# Altium PCB mainPCB.PcbDoc
Units mil, origin at the board's own origin, x right, y up, seen from the top; angles counter-clockwise.
Board outline 5975 x 3158 mil, 2 copper layers (Top Layer, Bottom Layer); 133 components, 132 nets, 584 pads, 62 vias.
Unrouted connection lines stored in the file: 153.
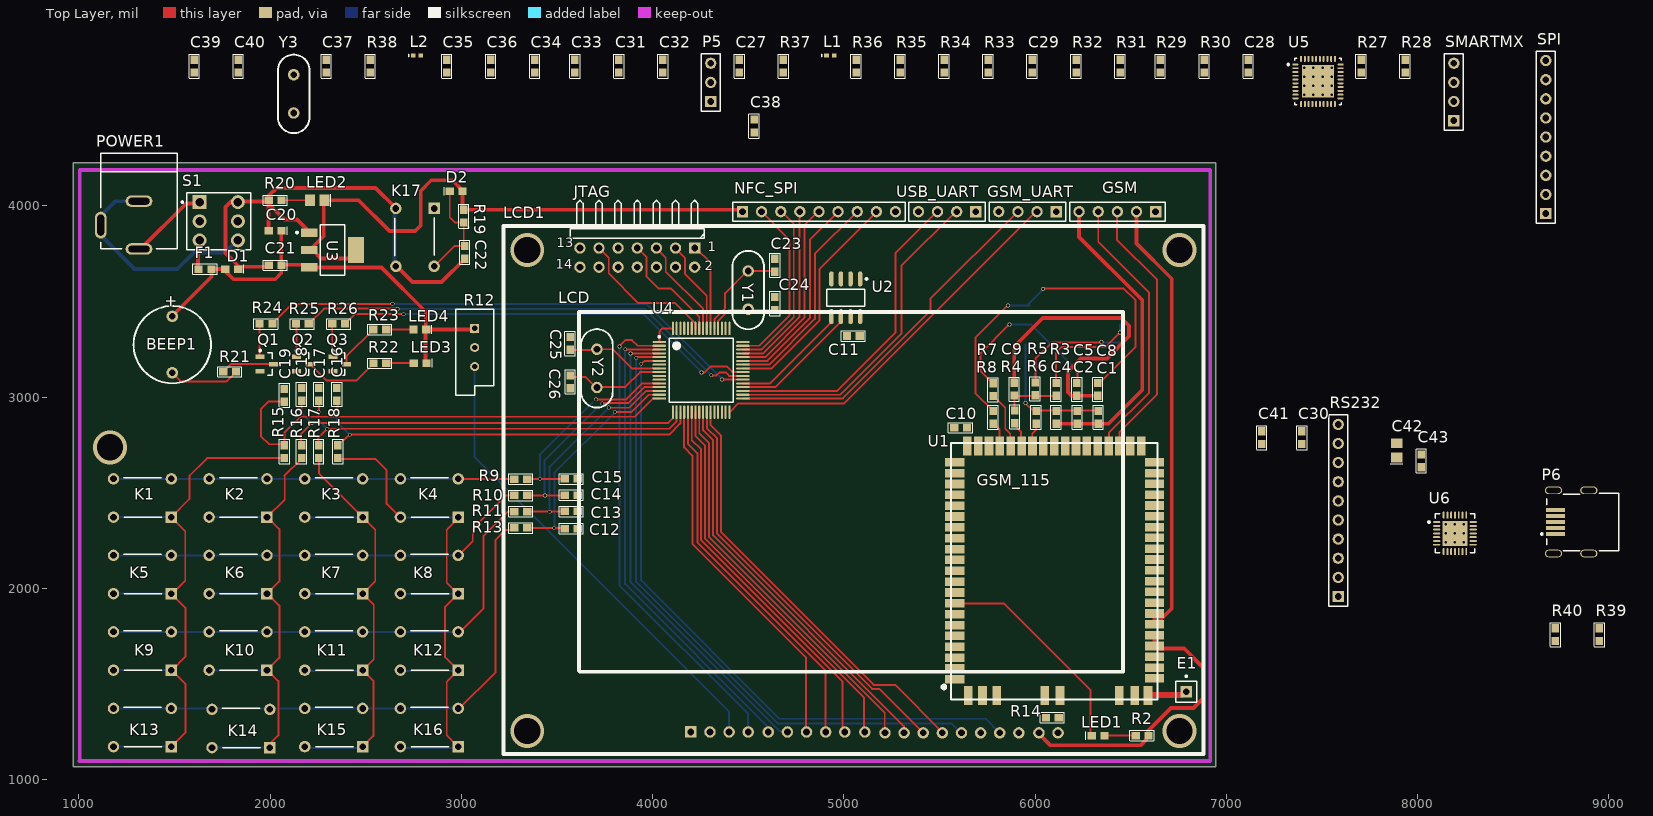
[diagram p0: Top Layer view]
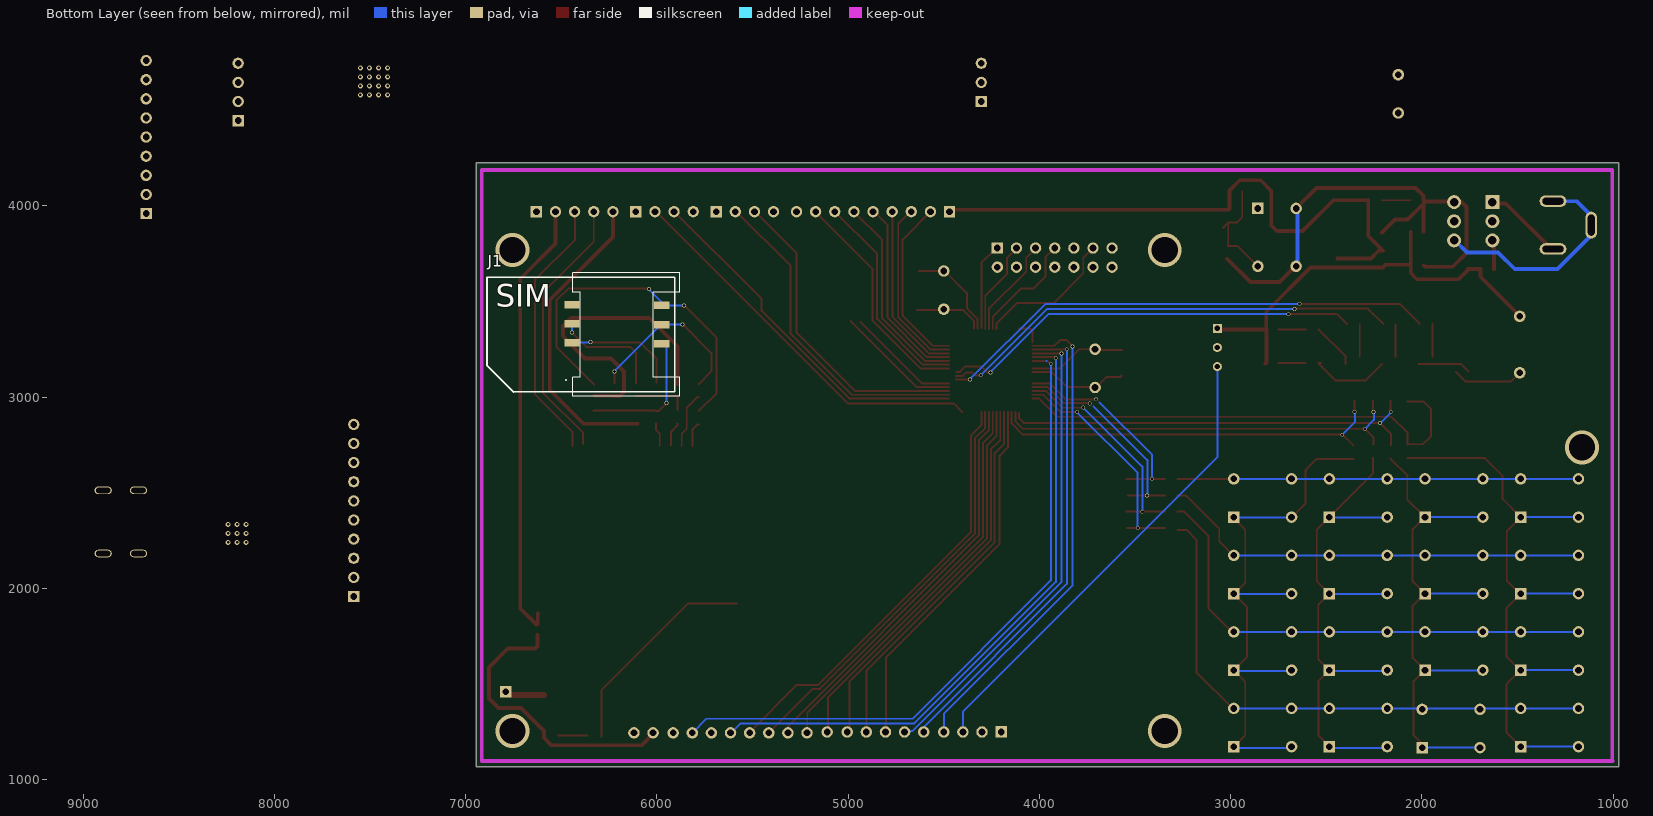
[diagram p1: Bottom Layer view, seen from below]

## Layer stack, top to bottom
Top Layer: signal copper 1.4
Dielectric: dielectric 12.6, FR-4, Dk 4.8
Bottom Layer: signal copper 1.4

## Board outline
970,4227 6945,4227 6945,1069 970,1069

## Design rules (kind name [scope] priority, off if disabled: settings)
Clearance [All] p1: gap=10
ComponentClearance [All] p1: gap=10 collisioncheckmode=3 verticalgap=10
HoleSize [All] p1: absolutevalues=TRUE maxlimit=200 minlimit=1 maxpercent=80.000 minpercent=20.000
PolygonConnect [All] p1: connectstyle=Relief reliefconductorwidth=10 reliefentries=4 polygonreliefangle="90 Angle"
RoutingVias [All] p1: holewidth=20 width=30 viastyle="Through Hole" minholewidth=15 minwidth=20 maxholewidth=196.85 maxwidth=314.96
SolderMaskExpansion [All] p1: expansion=4
TestPointUsage [All] p1: valid=0 allowmultiple=FALSE
Testpoint [All] p1: side=15 testpointundercomponent=TRUE minsize=40 maxsize=100 preferedsize=60 minholesize=0 maxholesize=40 preferedholesize=32 testpointgrid=1 style=1023 order=0-112345678
Width [All] p1: maxlimit=40 minlimit=10 preferedwidth=10
17 further rules are at their usual default settings.

## Classes and differential pairs
component class MSP-RFID: BEEP1 C10 C11 C13 C14 C15 C16 C17 C18 C19 C20 C21 C22 C23 C24 C25 C26 C27 D1 D2 F1 GSM_UART JTAG K1 K2 K3 K4 K5 K6 K7 K8 K9 K10 K11 K12 K13 K14 K15 K16 K17 LCD1 LED2 LED3 LED4 NFC_SPI POWER1 Q1 Q2 Q3 R9 R10 R11 R12 R13 R14 R15 R16 R17 R18 R19 R20 R21 R22 R23 R24 R25 R26 S1 U2 U3 U4 USB_UART Y1 Y2
component class NFC: C27 C28 C29 C31 C32 C33 C34 C35 C36 C37 C38 C39 C40 C41 C42 C43 L1 L2 P5 P6 R27 R28 R29 R30 R31 R32 R33 R34 R35 R36 R37 R38 R39 R40 RS232 SMARTMX SPI U5 U6 Y3
component class GSMPart: C1 C2 C4 C5 C8 C9 C10 E1 GSM J1 LED1 R2 R3 R4 R5 R6 R7 R8 U1

## Components (designator, comment, footprint, x,y, rotation, side; value= is the part's Value field where it differs from the comment)
BEEP1 "BEEP" BEEP 1489,3423 r270 top
C1 "Cap" 1608[0603] 6330,2895 r90 top
C2 "Cap" 1608[0603] 6220,2895 r90 top
C4 "Cap" 1608[0603] 6110,2895 r90 top
C5 "Cap" 1608[0603] 6218.6,3041 r90 top
C8 "Cap" 1608[0603] 6327.8,3041 r90 top
C9 "Cap" 1608[0603] 5891,3042 r270 top
C10 "Cap" 1608[0603] 5610,2840 r0 top
C11 "Cap" 1608[0603] 5050,3320 r0 top
C12 "Cap" 1608[0603] 3575,2313 r0 top
C13 "Cap" 1608[0603] 3575,2403 r0 top
C14 "Cap" 1608[0603] 3575,2488 r0 top
C15 "Cap" 1608[0603] 3575,2573 r0 top
C16 "Cap" 1608[0603] 2350,3015 r90 top
C17 "Cap" 1608[0603] 2255,3015 r90 top
C18 "Cap" 1608[0603] 2165,3015 r90 top
C19 "Cap" 1608[0603] 2075,3010 r90 top
C20 "CAP POL" "1608[0603] - POL" 2027,3870 r180 top
C21 "Cap" 1608[0603] 2027,3690 r0 top
C22 "Cap" 1608[0603] 3018,3757 r270 top
C23 "Cap" 1608[0603] 4640,3690 r270 top
C24 "Cap" 1608[0603] 4640,3490 r270 top
C25 "Cap" 1608[0603] 3569,3281 r90 top
C26 "Cap" 1608[0603] 3570,3080 r270 top
C27 "Cap" 1608[0603] 4454,4731 r90 top
C28 "Cap" 1608[0603] 7114,4731 r90 top
C29 "Cap" 1608[0603] 5984,4731 r90 top
C30 "Cap" 1608[0603] 7395,2789 r90 top
C31 "Cap" 1608[0603] 3824,4731 r90 top
C32 "Cap" 1608[0603] 4054,4731 r90 top
C33 "Cap" 1608[0603] 3594,4731 r90 top
C34 "Cap" 1608[0603] 3384,4731 r90 top
C35 "Cap" 1608[0603] 2924,4731 r90 top
C36 "Cap" 1608[0603] 3154,4731 r90 top
C37 "Cap" 1608[0603] 2294,4731 r90 top
C38 "Cap" 1608[0603] 4531,4418 r90 top
C39 "Cap" 1608[0603] 1604,4731 r90 top
C40 "Cap" 1608[0603] 1834,4731 r90 top
C41 "Cap" 1608[0603] 7185,2789 r90 top
C42 "CAP POL" "2012[0805] - POL" 7890,2722 r90 top
C43 "Cap" 1608[0603] 8019,2667 r90 top
D1 "1N4001" "1608[0603] - POL" 1800,3670 r180 top
D2 "1N4001" "1608[0603] - POL" 2973,4077 r0 top
E1 "Antenna" PIN1 6790,1460 r0 top
F1 "Fuse" 1608[0603] 1660,3670 r0 top
GSM "Header 5" HDR1X5 6630,3970 r180 top
GSM_UART "Header 4" HDR1X4 6110,3970 r180 top
J1 "SIMCard" PCB_SIM 5880,3650 r0 bottom locked
JTAG "Header 7X2H" HDR2X7H 4220,3780 r180 top
K1 "Key" KEY-4 1484,2373.07 r180 top
K2 "Key" KEY-4 1984,2373.07 r180 top
K3 "Key" KEY-4 2484,2373.07 r180 top
K4 "Key" KEY-4 2984,2373.07 r180 top
K5 "Key" KEY-4 1484,1973.07 r180 top
K6 "Key" KEY-4 1984,1973.07 r180 top
K7 "Key" KEY-4 2484,1973.07 r180 top
K8 "Key" KEY-4 2984,1973.07 r180 top
K9 "Key" KEY-4 1484,1573.07 r180 top
K10 "Key" KEY-4 1984,1573.07 r180 top
K11 "Key" KEY-4 2484,1573.07 r180 top
K12 "Key" KEY-4 2984,1573.07 r180 top
K13 "Key" KEY-4 1484,1173.07 r180 top
K14 "Key" KEY-4 1999,1168.07 r180 top
K15 "Key" KEY-4 2484,1173.07 r180 top
K16 "Key" KEY-4 2984,1173.07 r180 top
K17 "MCU_RST" KEY-4 2858,3987 r270 top
L1 "Inductor" 0402-A 4929,4786 r0 top
L2 "Inductor" 0402-A 2769,4786 r0 top
LCD1 "LCD12864" LCD-20PIN 4200,1250 r0 top locked
LED1 "Red LED" "1608[0603] - POL" 6329,1231 r0 top
LED2 "LED" "2012[0805] - POL" 2247,4030 r180 top
LED3 "LED" "1608[0603] - POL" 2784.46,3178 r180 top
LED4 "LED" "1608[0603] - POL" 2783.46,3354 r180 top
NFC_SPI "Header 9" HDR1X9 4470,3970 r0 top
P5 "Antenna" HDR1X3 4304,4546 r90 top
P6 "Mini USB-B" "MINI USB-501" 9025,2348 r0 top
POWER1 "POWER" POWER 1315,3775 r270 top
Q1 "NPN" SOT23-3L 1984,3173 r0 top
Q2 "NPN" SOT23-3L 2174,3173 r0 top
Q3 "NPN" SOT23-3L 2364,3173 r0 top
R2 "RES" 1608[0603] 6559,1231 r180 top
R3 "RES" 1608[0603] 6109.4,3041 r270 top
R4 "RES" 1608[0603] 5893.2,2897 r270 top
R5 "RES" 1608[0603] 6000.2,3044 r270 top
R6 "RES" 1608[0603] 6005,2895 r90 top
R7 "RES" 1608[0603] 5780,3040 r90 top
R8 "RES" 1608[0603] 5780,2895 r90 top
R9 "RES" 1608[0603] 3311,2572 r180 top
R10 "RES" 1608[0603] 3311,2487 r180 top
R11 "RES" 1608[0603] 3311,2402 r180 top
R12 "RPot" VR5 3070,3260 r270 top
R13 "RES" 1608[0603] 3311,2317 r180 top
R14 "Res" 1608[0603] 6090,1325 r180 top
R15 "RES" 1608[0603] 2075,2716 r270 top
R16 "RES" 1608[0603] 2165,2716 r270 top
R17 "RES" 1608[0603] 2255,2716 r270 top
R18 "RES" 1608[0603] 2355,2716 r270 top
R19 "Res" 1608[0603] 3013,3947 r90 top
R20 "Res" 1608[0603] 2027,4030 r180 top
R21 "Res" 1608[0603] 1789,3133 r180 top
R22 "Res" 1608[0603] 2574.46,3178 r180 top
R23 "Res" 1608[0603] 2573.46,3354 r180 top
R24 "Res" 1608[0603] 1979,3383 r180 top
R25 "Res" 1608[0603] 2169,3383 r180 top
R26 "Res" 1608[0603] 2359,3383 r180 top
R27 "RES" 1608[0603] 7704,4731 r90 top
R28 "RES" 1608[0603] 7934,4731 r90 top
R29 "RES" 1608[0603] 6654,4731 r90 top
R30 "RES" 1608[0603] 6884,4731 r90 top
R31 "RES" 1608[0603] 6444,4731 r90 top
R32 "RES" 1608[0603] 6214,4731 r90 top
R33 "RES" 1608[0603] 5754,4731 r90 top
R34 "RES" 1608[0603] 5524,4731 r90 top
R35 "RES" 1608[0603] 5294,4731 r90 top
R36 "RES" 1608[0603] 5064,4731 r90 top
R37 "RES" 1608[0603] 4684,4731 r90 top
R38 "RES" 1608[0603] 2524,4731 r90 top
R39 "Res" 1608[0603] 8950,1759 r90 top
R40 "Res" 1608[0603] 8720,1759 r90 top
RS232 "Header 10" HDR1X10 7585,1958 r90 top
S1 "SW-DPDT" DPDT-6 1732,3920 r0 top
SMARTMX "Header 4" HDR1X4 8189,4446 r90 top
SPI "Header 9" HDR1X9 8670,3960 r90 top
U1 "GSM_115" PCB_GSM_115 5560,1420 r180 top
U2 "AT24C04" SOIC127P600-8AN 5010,3520 r270 top
U3 "REG1117-3.3" SOT223 2327,3770 r270 top
U4 "MSP430F149" SQFP50P1200X1200-64N 4254,3141 r0 top
U5 "PN512-P40" QFN50P600X600-40VN 7479,4651 r0 top
U6 "CP2101" QFN50P500X500-28VAN 8195,2288 r0 top
USB_UART "Header 4" HDR1X4 5690,3970 r180 top
Y1 "XTAL" XTAL 4500,3560 r90 top
Y2 "XTAL" XTAL 3709,3151 r90 top
Y3 "27.12MHz" XTAL 2124,4586 r90 top

## Footprints (in the part's own frame and the unit in brackets; to place one, negate y for a bottom-side part, rotate by r counter-clockwise, add the part's x,y. Pads: shape width x height; smd on the part's side, far side on the other; paste and mask are expansions set on the pad)
0402-A [mm] "Chip Inductor; Body 1 x 0.5 mm (LxW typ)"
  rect 0.6x0.5 smd: 1(-0.5,0) 2(0.5,0)
  silkscreen extent -1.1,-0.15 -1.1,0.15
1608[0603] [mm] "Chip Capacitor; Body 1.6 x 0.8 mm (LxW typ)"
  rect 1.1x1 smd: 1(-0.85,0) 2(0.85,0)
  silkscreen extent -1.6,-0.69 1.6,0.69
"1608[0603] - POL" [mm] "Chip Capacitor; Body 1.6 x 0.8 mm (LxW typ)"
  rect 1.1x1 smd: 1(-0.85,0) 2(0.85,0)
  silkscreen extent -1.6,-0.56 -1.6,0.53
"2012[0805] - POL" [mm] "Chip Resistor; Body 2.0 x 1.3 mm (LxW typ)"
  rect 1.3x1.5 smd: 1(-0.95,0) 2(0.95,0)
  silkscreen extent -1.8,-0.81 -1.8,0.84
BEEP [mil]
  round 60 hole 35: 1(0,0) 2(295.28,0)
  silkscreen extent -54,-202 350,202
DPDT-6 [mm] "Double-Pole, Double-Throw Switch; 6 Leads"
  rect 1.85x1.85 hole 1.1: 1(-2.54,2.54)
  round 1.85 hole 1.1: 2(-2.54,0) 3(-2.54,-2.54) 4(2.54,-2.54) 5(2.54,0) 6(2.54,2.54)
  silkscreen extent -4.96,-3.81 4.28,3.81
HDR1X3 [mm] "Connector; Header; 3 Position"
  rect 1.5x1.5 hole 0.9: 1(0,0)
  round 1.5 hole 0.9: 2(2.54,0) 3(5.08,0)
  silkscreen extent -1.27,-1.27 6.35,1.27
HDR1X4 [mm] "Connector; Header; 4 Position"
  rect 1.5x1.5 hole 0.9: 1(0,0)
  round 1.5 hole 0.9: 2(2.54,0) 3(5.08,0) 4(7.62,0)
  silkscreen extent -1.27,-1.27 8.89,1.27
HDR1X5 [mm] "Connector; Header; 5 Position"
  rect 1.5x1.5 hole 0.9: 1(0,0)
  round 1.5 hole 0.9: 2(2.54,0) 3(5.08,0) 4(7.62,0) 5(10.16,0)
  silkscreen extent -1.27,-1.27 11.43,1.27
HDR1X9 [mm] "Connector; Header; 9 Position"
  rect 1.5x1.5 hole 0.9: 1(0,0)
  round 1.5 hole 0.9: 2(2.54,0) 3(5.08,0) 4(7.62,0) 5(10.16,0) 6(12.7,0) 7(15.24,0) 8(17.78,0) 9(20.32,0)
  silkscreen extent -1.27,-1.27 21.59,1.27
HDR1X10 [mm] "Connector; Header; 10 Position"
  rect 1.5x1.5 hole 0.9: 1(0,0)
  round 1.5 hole 0.9: 2(2.54,0) 3(5.08,0) 4(7.62,0) 5(10.16,0) 6(12.7,0) 7(15.24,0) 8(17.78,0) 9(20.32,0) 10(22.86,0)
  silkscreen extent -1.27,-1.27 24.13,1.27
HDR2X7H [mm] "Connector; Header; 7x2 Position; Right Angle"
  rect 1.5x1.5 hole 0.9: 1(0,0)
  round 1.5 hole 0.9: 2(0,2.54) 3(2.54,0) 4(2.54,2.54) 5(5.08,0) 6(5.08,2.54) 7(7.62,0) 8(7.62,2.54) 9(10.16,0) 10(10.16,2.54) 11(12.7,0) 12(12.7,2.54) 13(15.24,0) 14(15.24,2.54)
  silkscreen extent -1.27,-6.35 16.51,-1.27
KEY-4 [mil]
  rect 60x60 hole 35: 1(0,0)
  round 60 hole 35: 1(302.36,0) 2(0,-200) 2(302.36,-200)
  silkscreen extent 50,-205 248,0
LCD-20PIN [mil]
  rect 60x60 hole 35: 1(0,0)
  round 60 hole 35: 2(100,0) 3(200,0) 4(300,0) 5(405,0) 6(505,0) 7(605,0) 8(705,0) 9(805,0) 10(910,0) 11(1015,-5) 12(1115,-5) 13(1215,-5) 14(1315,-5) 15(1415,-5) 16(1515,-5) 17(1615,-5) 18(1715,-5) 19(1820,-5) 20(1920,-5)
  silkscreen extent -980,-115 2680,2645
"MINI USB-501" [mm]
  rect 2.5x0.5 smd: 1(-7.723,-1.6) 2(-7.723,-0.8) 3(-7.723,0) 4(-7.723,0.8) 5(-7.723,1.6)
  round 0.6 hole 0.9 unplated: MH1(-5.25,2.2) MH2(-5.25,-2.2)
  oval 2.3x1 hole 0.7 slot 1.9 at 0 deg: ""(-8.001,-4.191) ""(-8.001,4.191) ""(-3.302,-4.191) ""(-3.302,4.191)
  silkscreen extent -9.67,-3.81 0.7,3.81
PCB_GSM_115 [mil]
  rect 100x45 smd: 1(-20,-105) 2(-20,-161.75) 3(-20,-218.5) 4(-20,-275.25) 5(-20,-332) 6(-20,-388.75) 7(-20,-445.5) 8(-20,-502.25) 9(-20,-559) 10(-20,-615.75) 11(-20,-672.5) 12(-20,-729.25) 13(-20,-786) 14(-20,-842.75) 15(-20,-899.5) 16(-20,-956.25) 17(-20,-1013) 18(-20,-1069.75) 19(-20,-1126.5) 20(-20,-1183.25) 21(-20,-1240) 39(-1065,-1240) 40(-1065,-1183.5) 41(-1065,-1127) 42(-1065,-1070.5) 43(-1065,-1014) 44(-1065,-957.5) 45(-1065,-901) 46(-1065,-844.5) 47(-1065,-788) 48(-1065,-731.5) 49(-1065,-675) 50(-1065,-618.5) 51(-1065,-562) 52(-1065,-505.5) 53(-1065,-449) 54(-1065,-392.5) 55(-1065,-336) 56(-1065,-279.5) 57(-1065,-223) 58(-1065,-166.5) 59(-1065,-110)
  rect 45x100 smd: 22(-85,-1325) 23(-141.87,-1325) 24(-198.75,-1325) 25(-255.62,-1325) 26(-312.5,-1325) 27(-369.37,-1325) 28(-426.25,-1325) 29(-483.12,-1325) 30(-540,-1325) 31(-596.87,-1325) 32(-653.75,-1325) 33(-710.62,-1325) 34(-767.5,-1325) 35(-824.37,-1325) 36(-881.25,-1325) 37(-938.12,-1325) 38(-995,-1325) 60(-1030,-20) 61(-960,-20) 62(-880,-20) 63(-570,-20) 64(-490,-20) 65(-240,-20) 66(-165,-20) 67(-90,-20)
  silkscreen extent -1080,-1340 44,0
PCB_SIM [mm]
  rect 2x1 smd: 1(2.4,9.4) 2(2.4,6.86) 3(2.4,4.32) 4(14.3,4.22) 5(14.3,6.76) 6(14.3,9.3)
  silkscreen extent 0,0 25.6,16.4
PIN1 [mm] "Generic Antenna; 1 Lead"
  rect 1.5x1.5 hole 0.9: 1(0,0)
  silkscreen extent -1.4,-1.4 1.4,2.17
POWER [mil]
  oval 60x140 hole 35 slot 110 at 90 deg: 1(0,0) 2(-250,0)
  oval 140x60 hole 35 slot 110 at 0 deg: 2(-125,-200)
  silkscreen extent -500,-200 0,200
QFN50P500X500-28VAN [mm] "28-Pin Plastic Quad Flat No-Lead 0.5 mm Pitch"
  oval 0.95x0.25 smd: 1(-2.425,1.5) 2(-2.425,1) 3(-2.425,0.5) 4(-2.425,0) 5(-2.425,-0.5) 6(-2.425,-1) 7(-2.425,-1.5) 15(2.425,-1.5) 16(2.425,-1) 17(2.425,-0.5) 18(2.425,0) 19(2.425,0.5) 20(2.425,1) 21(2.425,1.5)
  oval 0.25x0.95 smd: 8(-1.5,-2.425) 9(-1,-2.425) 10(-0.5,-2.425) 11(0,-2.425) 12(0.5,-2.425) 13(1,-2.425) 14(1.5,-2.425) 22(1.5,2.425) 23(1,2.425) 24(0.5,2.425) 25(0,2.425) 26(-0.5,2.425) 27(-1,2.425) 28(-1.5,2.425)
  rect 3.3x3.3 smd: 29(0,0)
  silkscreen extent -3.57,-2.6 2.6,2.6, body extent -2.58,-2.58 2.58,2.58, height 1
QFN50P600X600-40VN [mm] "QFN, 40-Leads, Body 6x6mm, Pitch 0.5mm, IPC Medium Density"
  oval 0.8x0.25 smd: 1(-3,2.25) 2(-3,1.75) 3(-3,1.25) 4(-3,0.75) 5(-3,0.25) 6(-3,-0.25) 7(-3,-0.75) 8(-3,-1.25) 9(-3,-1.75) 10(-3,-2.25) 21(3,-2.25) 22(3,-1.75) 23(3,-1.25) 24(3,-0.75) 25(3,-0.25) 26(3,0.25) 27(3,0.75) 28(3,1.25) 29(3,1.75) 30(3,2.25)
  oval 0.25x0.8 smd: 11(-2.25,-3) 12(-1.75,-3) 13(-1.25,-3) 14(-0.75,-3) 15(-0.25,-3) 16(0.25,-3) 17(0.75,-3) 18(1.25,-3) 19(1.75,-3) 20(2.25,-3) 31(2.25,3) 32(1.75,3) 33(1.25,3) 34(0.75,3) 35(0.25,3) 36(-0.25,3) 37(-0.75,3) 38(-1.25,3) 39(-1.75,3) 40(-2.25,3)
  rect 4.3x4.3 smd: 41(0,0)
  silkscreen extent -4.07,-3.1 3.1,3.1, body extent -3.08,-3.08 3.08,3.08, height 0.8
SOIC127P600-8AN [mm] "SOIC, 8-Leads, Body 4.9x3.9mm, Pitch 1.27mm, IPC Medium Density"
  oval 2x0.6 smd: 1(-2.5,1.905) 2(-2.5,0.635) 3(-2.5,-0.635) 4(-2.5,-1.905) 5(2.5,-1.905) 6(2.5,-0.635) 7(2.5,0.635) 8(2.5,1.905)
  silkscreen extent -2.62,-2.5 1.1,2.88, body extent -2,-2.5 2,2.5, height 2.72
SOT23-3L [mm] "SOT23, 3-Leads, Body 2.9x1.3mm, Pitch 0.95mm, Lead Span 2.5mm, IPC High Density"
  rect 1.2x0.6 smd: 1(-0.9,0.95) 2(-0.9,-0.95) 3(0.9,0)
  silkscreen extent -1.02,-1.5 0.7,1.92, body extent -0.7,-1.5 0.7,1.5, height 1.1
SOT223 [mm]
  rect 1.1x2.15 smd: 1(-2.3,-3.1) 2(0,-3.1) 3(2.3,-3.1)
  rect 3.5x2.15 smd: 4(0,3.1)
  silkscreen extent -3.35,-4.85 3.35,1.63
SQFP50P1200X1200-64N [mm] "Shrink QFP, 64-Leads, Body 10x10mm, Pitch 0.5mm, IPC Medium Density"
  oval 1.8x0.279 smd: 1(-5.55,3.75) 2(-5.55,3.25) 3(-5.55,2.75) 4(-5.55,2.25) 5(-5.55,1.75) 6(-5.55,1.25) 7(-5.55,0.75) 8(-5.55,0.25) 9(-5.55,-0.25) 10(-5.55,-0.75) 11(-5.55,-1.25) 12(-5.55,-1.75) 13(-5.55,-2.25) 14(-5.55,-2.75) 15(-5.55,-3.25) 16(-5.55,-3.75) 33(5.55,-3.75) 34(5.55,-3.25) 35(5.55,-2.75) 36(5.55,-2.25) 37(5.55,-1.75) 38(5.55,-1.25) 39(5.55,-0.75) 40(5.55,-0.25) 41(5.55,0.25) 42(5.55,0.75) 43(5.55,1.25) 44(5.55,1.75) 45(5.55,2.25) 46(5.55,2.75) 47(5.55,3.25) 48(5.55,3.75)
  oval 0.279x1.8 smd: 17(-3.75,-5.55) 18(-3.25,-5.55) 19(-2.75,-5.55) 20(-2.25,-5.55) 21(-1.75,-5.55) 22(-1.25,-5.55) 23(-0.75,-5.55) 24(-0.25,-5.55) 25(0.25,-5.55) 26(0.75,-5.55) 27(1.25,-5.55) 28(1.75,-5.55) 29(2.25,-5.55) 30(2.75,-5.55) 31(3.25,-5.55) 32(3.75,-5.55) 49(3.75,5.55) 50(3.25,5.55) 51(2.75,5.55) 52(2.25,5.55) 53(1.75,5.55) 54(1.25,5.55) 55(0.75,5.55) 56(0.25,5.55) 57(-0.25,5.55) 58(-0.75,5.55) 59(-1.25,5.55) 60(-1.75,5.55) 61(-2.25,5.55) 62(-2.75,5.55) 63(-3.25,5.55) 64(-3.75,5.55)
  silkscreen extent -5.67,-4.25 4.25,4.57, body extent -5,-5 5,5, height 2.2
VR5 [mm] "Potentiometer; 3 Leads"
  rect 1.2x1.2 hole 0.7: 1(-2.54,0)
  round 1.2 hole 0.7: 2(0,0) 3(2.54,0)
  silkscreen extent -5.08,-2.54 6.35,2.54
XTAL [mil]
  round 60 hole 35: 1(-100,0) 2(100,0)
  silkscreen extent -205,-83 205,83

## Part data
C1 C2 C4 C5 C8 C9 C10 C11 C12 C13 C14 C15 C16 C17 C18 C19 C21 C22 C23 C24 C25 C26 C27 C28 C29 C30 C31 C32 C33 C34 C35 C36 C37 C38 C39 C40 C41 C43: "Capacitor"
C20 C42: "Polarized Capacitor (Axial)"
D1 D2: library part "Diode 1N4001", "1 Amp General Purpose Rectifier"
E1: "Generic Antenna"
F1: library part FUSE1
GSM: "Header, 5-Pin"
GSM_UART SMARTMX USB_UART: "Header, 4-Pin"
J1: "Sim Card"
JTAG: "Header, 7-Pin, Dual row, Right Angle"
K1 K2 K3 K4 K5 K6 K7 K8 K9 K10 K11 K12 K13 K14 K15 K16 K17: library part SW-PB
LED1: library part LED
NFC_SPI SPI: "Header, 9-Pin"
P5: library part "Header 3", "Header, 3-Pin"
P6: library part USB, "Mini USB Type B"
R2 R3 R4 R5 R6 R7 R8 R9 R10 R11 R13 R15 R16 R17 R18 R27 R28 R29 R30 R31 R32 R33 R34 R35 R36 R37 R38: "Resistor"
R12: "Potentiometer"
R14 R19 R20 R21 R22 R23 R24 R25 R26 R39 R40: library part RES, "Resistor"
RS232: "Header, 10-Pin"
S1: "Double-Pole, Double-Throw Switch"
U1: library part GSM115
U4: library part F14X
U5: library part PN511-P40
Y1 Y2: "Crystal Oscillator"
Y3: library part XTAL, "Crystal Oscillator"

## Via types
v1: diameter 20, hole 15, Top Layer to Bottom Layer, 32 vias
v2: diameter 25.98, hole 12.99, Top Layer to Bottom Layer, tented top, 25 vias
v3: diameter 177.17, hole 137.8, Top Layer to Bottom Layer, 5 vias

## Nets (pads, with @x,y where several pads share a name; then routed paths per layer and width w, separated by ;. In a path a pad name is that pad's centre, name@x,y a point inside that pad or via, vN(x,y) a via of type N, cw(c..) or ccw(c..) an arc to the next point about the centre after c; other vN are vias at no path point)
BEEP: R24.1 U4.38 | length 2631.3
  Top Layer w10: R24.1 2117.46,3488 v1@2639,3488 ; v1(4363,3092) 4436.16,3092 4436.48,3091.68
  Bottom Layer w10: v1@2639,3488 3968,3488 v1@4363,3093
  other v1: 2640,3489
C0: K1.1 K5.1 K9.1 K13.1 R15.2 | length 3391.1
  Top Layer w10: K9.1@1181,1573 K9.1@1181.07,1573.07 ; K13.1@1484,1173.07 1559,1248.07 1559,1499 K9.1@1485,1573 ; K5.1@1484,1973.07 1558,1899.07 1558,1643 K9.1@1485,1570 ; K5.1@1486,1970 1557,2041 1557,2298 K1.1@1488,2367 ; K1.1@1486,2375 1579,2468 1579,2590 1671,2682 R15.2@2077,2682 ; K13.1@1486.07,1173.07 K13.1@1487,1174
  Bottom Layer w10: K5.1@1177,1973 K5.1@1486,1973 ; K1.1@1180.93,2373.07 K1.1@1484,2373.07 ; K9.1@1181.07,1573.07 K9.1@1484,1573.07 ; K13.1@1181.64,1173.07 K13.1@1486.07,1173.07
C1: K2.1 K6.1 K10.1 K14.1 R16.2 | length 2958.9
  Top Layer w10: K14.1@1985.64,1174.07 2044,1232.43 2044,1515.71 1985.64,1574.07 2049,1637.43 2049,1910.71 1985.64,1974.07 2049,2037.43 2049,2310.71 1985.64,2374.07 2076.78,2465.22 ; 2075,2589 R16.2@2165,2679 ; 2077,2465 2077,2591
  Bottom Layer w10: K10.1@1675,1571 1978,1571 K10.1@1980,1573 ; K6.1@1681.64,1973.07 1985.07,1973.07 K6.1@1987,1975 ; K2.1@1681.64,2373.07 1983.07,2373.07 K2.1@1985,2375 ; K14.1@1691,1169 1994,1169 K14.1@1997,1166
C2: K3.1 K7.1 K11.1 K15.1 R17.2 | length 2963
  Top Layer w10: R17.2@2257,2682 2257,2600 2550,2307 2550,2039.07 2484,1973.07 2542.07,1915 2542.07,1631.14 2484,1573.07 2540,1517.07 2540,1229.07 K15.1@2484,1173.07
  Bottom Layer w10: K11.1@2176,1569 K11.1@2479,1569 ; K7.1@2182.64,1971.07 K7.1@2486.07,1971.07 ; K3.1@2182.64,2371.07 K3.1@2484.07,2371.07 ; K15.1@2192,1167 K15.1@2495,1167
C3: K4.1 K8.1 K12.1 K16.1 R18.2 | length 3112.6
  Top Layer w10: R18.2@2357,2678 2549,2678 2610,2617 2610,2442 K4.1@2680,2372 ; K16.1@2980,1176 2924,1232 2924,1513 2984,1573 2914,1643 2914,1903 2984,1973 2980,1973 2924,2029 2924,2307 2980,2363 K4.1@2980,2369
  Bottom Layer w10: K12.1@2675,1569 K12.1@2978,1569 ; K8.1@2681.64,1971.07 K8.1@2985.07,1971.07 ; K4.1@2681.64,2371.07 K4.1@2983.07,2371.07 ; K16.1@2691,1167 K16.1@2994,1167
CTS: RS232.9 U6.23
D+: P6.3 U6.4
D-: P6.2 U6.5
DB0: LCD1.7 U4.20 | length 1930.3
  Top Layer w10: U4.20@4165,2923 4165,2738 4208,2695 4208,2234 4803,1639 LCD1.7@4803,1257
DB1: LCD1.8 U4.21 | length 1969.7
  Top Layer w10: U4.21 4185.1,2756.9 4234,2708 4234,2242 4905,1571 LCD1.8@4905,1251
DB2: LCD1.9 U4.22 | length 1990.4
  Top Layer w10: U4.22 4204.79,2776.21 4254,2727 4254,2253 4994,1513 LCD1.9@4994,1259
DB3: LCD1.10 U4.23 | length 2034.6
  Top Layer w10: U4.23 4224.47,2796.53 4275,2746 4275,2261 5106,1430 LCD1.10@5106,1253
DB4: LCD1.11 U4.24 | length 2073.2
  Top Layer w10: U4.24 4244.16,2811.84 4296,2760 4296,2269 5214,1351 LCD1.11@5214,1251
DB5: LCD1.12 U4.25 | length 2111.8
  Top Layer w10: U4.25 4263.84,2826.16 4316,2774 4316,2277.88 5313.5,1280.38 LCD1.12@5313.5,1245.5
DB6: LCD1.13 U4.26 | length 2170.3
  Top Layer w10: U4.26 4283.53,2838.47 4337,2785 4337,2286 5147.59,1475.41 5185.59,1475.41 LCD1.13@5417,1244
DB7: LCD1.14 U4.27 | length 2243.9
  Top Layer w10: U4.27 4303.21,2853.79 4358,2799 4358,2294 5156,1496 5268,1496 LCD1.14@5517,1247
DCD: RS232.3 U6.1
DSR: RS232.5 U6.27
DTR: RS232.4 U6.28
EN: LCD1.6 U4.4 | length 2487.9
  Top Layer w10: v1@3886,3229 U4.4@4036,3229
  Bottom Layer w10: v1@3885,3228 3884,3227 3884,2035 4665,1254 LCD1.6@4705,1254
  other v1: 3885,3229
GND: C1.1 C2.1 C4.1 C5.1 C8.1 C9.1 C10.1 C11.1 C12.2 C13.2 C14.2 C15.2 C16.2 C17.2 C18.2 C19.2 C20.2 C21.1 C22.2 C23.1 C24.1 C25.2 C26.2 C27.1 C29.2 C31.1 C32.1 C33.1 C34.2 C35.2 C36.2 C38.1 C39.1 C40.1 C41.1 C42.2 C43.1 D1.1 GSM.5 GSM_UART.4 J1.4 JTAG.9 K17.2 LCD1.1 LCD1.19 NFC_SPI.9 P5.2 P6.4 Q1.2 Q2.2 Q3.2 R2.1 R12.2 R20.2 R32.1 R33.1 R34.1 R35.1 R36.1 R40.2 RS232.10 S1.6 SMARTMX.4 SPI.9 U1.9 U1.55 U1.56 U2.1 U2.2 U2.3 U2.4 U3.1 U4.62 U4.63 U5.7 U5.8 U5.17 U5.21 U6.3 USB_UART.4 | length 7406.1
  Top Layer w20: S1.6@1827,4026 1799,4026 1767,3994 1767,3754 1839,3682 1984,3682 C21.1@1991,3689 ; S1.6@1829,4023 1982,4023 1992,4013 C20.2@1992,3867 ; R20.2@1990,4029 1990,4014 2075,3929 2141,3929 U3.1@2209,3861 ; R20.2@1992,4030 1992,4053 2033,4094 2552,4094 K17.2@2658,3988 ; K17.2@2654,3681 2666,3681 2745,3602 2897,3602 C22.2@3019,3724 ; C9.1@5891,3068 5891,3266 6040,3415 6444,3415 ; LCD1.19@6015,1246 6081,1180 6551,1180 6591,1220 6591,1255 6711,1375 6828,1375 6878,1425 6878,1587 6779.5,1685.5 6637.5,1685.5 6625,1698 U1.55 ; C4.1@6100.46,2861.54 6384.54,2861.54 6560,3037 6560,3508 6230,3838 GSM.5@6230,3968 ; C8.1 6221.46,3007.54 6219.93,3006 6193,3006 6172,3027 6172,3135 6240,3203 6375,3203 6491,3319 6491,3374 6452,3413
  Bottom Layer w20: K17.2@2651,3987 2651,3689 K17.2@2656,3684
IRQ: NFC_SPI.7 U4.42 | length 1126.4
  Top Layer w10: U4.42 4610.53,3170.53 4849,3409 4849,3749 NFC_SPI.7@5069,3969
IRQ1: SPI.7 U5.26
KC0: C19.1 R15.1 U4.16 | length 2516.2
  Top Layer w10: R15.1@2074,2754 1995,2754 1952,2797 1952,2938 1991,2977 C19.1@2075,2977 ; R15.1@2075,2752 2075,2813 2160,2898 3908,2898 4003.36,2993.36 U4.16
KC1: C18.1 R16.1 U4.17 | length 2203.9
  Top Layer w10: R16.1@2163,2749 2163,2809 2220,2866 4083,2866 4106,2889 U4.17@4106,2919 ; v1@2165,2927 C18.1
  Bottom Layer w10: v1(2163,2924) 2163,2920 v1@2219,2864
  other v1: 2220,2865
KC2: C17.1 R17.1 U4.18 | length 2158.1
  Top Layer w10: R17.1@2253,2752 2253,2789 2299,2835 4087,2835 4125.27,2873.27 4125.27,2921.72 U4.18 ; v1@2255,2922 C17.1
  Bottom Layer w10: v1@2251,2918 2251,2881 v1@2299,2833
  other v1: 2299,2834 2253,2922
KC3: C16.1 R18.1 U4.19 | length 2092.2
  Top Layer w10: v1@2352,2927 C16.1@2352,2980 ; R18.1@2358,2748 2415,2805 4088,2805 4145.73,2862.73 U4.19
  Bottom Layer w10: v1@2350,2921 2350,2873 v1@2418,2805
  other v1: 2417,2804 2352,2924
KR0: C15.1 R9.1 U4.12 | length 1078.5
  Top Layer w10: R9.1 C15.1@3544,2572 ; 3704,2989 3863,2989 3946.1,3072.1 U4.12 U4.12@4034.72,3071.32
  Bottom Layer w10: v1(3411,2574) 3411,2698 3685.35,2972.35
KR1: C14.1 R10.1 U4.13 | length 1109.1
  Top Layer w10: R10.1 C14.1@3537,2487 ; 3736,2969 3873,2969 3957,3053 4034.91,3053 U4.13
  Bottom Layer w10: v1@3436,2487 3436,2671 3717.44,2952.44
  other v1: 3437,2487
KR2: C13.1 R11.1 U4.14 | length 1176.7
  Top Layer w10: R11.1 C13.1@3544,2402 ; v1@3771,2945 3879,2945 3966.73,3032.73 U4.14 U4.14@4035.23,3033
  Bottom Layer w10: v1@3462,2399 3462,2637 3771,2946 v1(3771,2947)
  other v1: 3462,2401
KR3: C12.1 R13.1 U4.15 | length 1202.5
  Top Layer w10: R13.1 C12.1@3542,2317 ; v1@3804,2919 3807,2922 3889,2922 3980.05,3013.05 U4.15
  Bottom Layer w10: v1@3487,2319 3487,2604 3802,2919 v1(3802,2923)
  other v1: 3486,2316
LED1: R25.1 U4.39 | length 2428.1
  Top Layer w10: R25.1 2282.46,3463 v1@2667,3463 ; v1@4309,3114 4334,3114 4350,3130 4382,3130 4400,3112 4435.27,3112
  Bottom Layer w10: v1(2666,3461) 3961,3461 v1(4307,3115) v1@4312.72,3115
LED2: R26.1 U4.40 | length 2217.8
  Top Layer w10: R26.1 2445.46,3436 v1@2698,3436 ; v1@4255,3130 4273,3130 4304,3161 4387,3161 4416,3132 4434.5,3132
  Bottom Layer w10: v1(2698,3434) 3954,3434 v1@4258,3130
  other v1: 4256,3129
MISO1: SPI.3 U5.38
MOSI1: SPI.4 U5.37
NCS1: SPI.5 U5.30
NetBEEP1_2: BEEP1.2 R21.1 | length 372.7
  Top Layer w10: BEEP1.2 1533.72,3083 1772.46,3083 R21.1
NetC1_2: C1.2 C2.2 C4.2 J1.1 R6.2 | length 709.2
  Top Layer w10: v1(5949,2969) 5990,2928 R6.2@6007,2928 ; R6.2@6005,2931 6329,2931 C1.2@6332,2928
  Bottom Layer w10: v1(5949,2969) 5949,3216 J1.1@5949,3275
NetC5_2: C5.2 J1.2 R7.2 | length 916.8
  Top Layer w10: R7.2@5782,3069 5715,3136 5715,3231 v1@5865,3381 ; C5.2@6222,3075 v1(6222,3135)
  Bottom Layer w10: v1@5867,3381 J1.2@5974,3381 ; J1.2@5976,3381 v1(6222,3135)
  other v1: 5866,3381
NetC8_2: C8.2 J1.3 R8.2 | length 1913.1
  Top Layer w10: R8.2@5781,2929 5688,3022 5688,3311 5857,3480 v1(5858,3480) ; v1@6046,3568 6461,3568 ; C8.2@6328,3066 6525,3263 6525,3506 6461,3570
  Bottom Layer w10: v1(5858,3480) J1.3@5970,3480 ; J1.3@5965,3486 6041,3562 v1@6041,3568
  other v1: 6042,3565
NetC9_2: C9.2 R3.2 R4.1 R5.2 | length 292.3
  Top Layer w10: C9.2@5888,3007 R3.2@6109,3007 ; R4.1@5893.2,2933.2 C9.2@5893.2,3004.54
NetC23_2: C23.2 U4.53 Y1.2 | length 504.3
  Top Layer w10: U4.53 4322.9,3408.9 4379,3465 4379,3544 Y1.2@4497.5,3662.5 ; Y1.2 C23.2@4629,3660
NetC24_2: C24.2 U4.52 Y1.1 | length 361.3
  Top Layer w10: U4.52 4342.58,3399.58 4400,3457 C24.2@4640,3457
NetC25_1: C25.1 U4.8 Y2.2 | length 509.4
  Top Layer w10: C25.1 3705.54,3247.54 Y2.2 3791,3251 3891.16,3150.84 U4.8
NetC26_1: C26.1 U4.9 Y2.1 | length 521.7
  Top Layer w10: C26.1 3578.46,3105 3650,3105 3700.54,3054.46 3858.46,3054.46 3935.16,3131.16 U4.9
NetC28_1: C28.1 R29.2 U5.20
NetC28_2: C28.2 R30.2
NetC29_1: C29.1 R29.1 U5.19
NetC30_1: C30.1 C33.2 L1.2 R30.1
NetC30_2: C30.2 C31.2 C32.2 R37.2
NetC34_1: C34.1 C36.1 C37.2 R38.2
NetC35_1: C35.1 C37.1 L2.2
NetC39_2: C39.2 U5.24 Y3.1
NetC40_2: C40.2 U5.25 Y3.2
NetC41_2: C41.2 R39.1 U6.6
NetE1_1: E1.1 U1.60 | length 205.3
  Top Layer w30: U1.60@6590,1443 6767,1443 E1.1@6787,1463
NetF1_1: F1.1 S1.3 | length 156.5
  Top Layer w20: F1.1@1623,3669 1623,3817 S1.3@1629,3823
NetJ1_5: J1.5 R3.1 | length 576.1
  Top Layer w10: R3.1@6109,3075 6109,3232 6140,3263 6370,3263 v1@6443,3336
  Bottom Layer w10: v1(6444,3339) J1.5@6444,3381
NetJ1_6: J1.6 R5.1 | length 590.6
  Top Layer w10: R5.1@6002,3078 6002,3200 6088,3286 v1@6343,3286
  Bottom Layer w10: v1@6347,3287 J1.6@6439,3287
  other v1: 6347,3288
NetL1_1: L1.1 U5.14
NetL2_1: L2.1 U5.16
NetLCD1_3: LCD1.3 R12.3 | length 2459.5
  Bottom Layer w10: R12.3 3070,2686 4399,1357 LCD1.3@4399,1251
NetLCD1_20: LCD1.20 R14.1
NetLED1_1: LED1.1 U1.8 | length 1141.7
  Top Layer w10: U1.8 5836.75,1922.25 6290,1469 LED1.1@6290,1225
NetLED1_2: LED1.2 R2.2 | length 152.5
  Top Layer w10: LED1.2 R2.2@6515,1231
NetLED2_2: LED2.2 R20.1 | length 149.1
  Top Layer w10: R20.1 LED2.2
NetLED3_2: LED3.2 R22.1 | length 143.1
  Top Layer w10: R22.1 LED3.2
NetLED4_2: LED4.2 R23.1 | length 143.1
  Top Layer w10: R23.1 LED4.2
NetP5_1: P5.1 R37.1
NetP5_3: P5.3 R38.1
NetPOWER1_1: POWER1.1 S1.1 | length 448.1
  Top Layer w20: POWER1.1@1313,3764 1562,4013 S1.1@1658,4013
NetPOWER1_2: POWER1.2 S1.4 | length 1187.9
  Bottom Layer w20: POWER1.2@1319,4025 1192,4025 1117,3950 1117,3845 1292,3670 1515,3670 1602,3757 1765,3757 S1.4@1831,3823
NetQ1_1: Q1.3 R21.2 | length 280.5
  Top Layer w10: R21.2 1795.54,3173 Q1.3
NetQ1_2: Q1.1 R24.2 | length 169.6
  Top Layer w10: Q1.1@1945.54,3213.43 R24.2
NetQ2_1: Q2.3 R22.2 | length 419.4
  Top Layer w10: Q2.3 2295.43,3087 2450,3087 R22.2 R22.2@2526.46,3178
NetQ2_2: Q2.1 R25.2 | length 169.6
  Top Layer w10: Q2.1 R25.2@2138.57,3379.97
NetQ3_1: Q3.3 R23.2 | length 239.2
  Top Layer w10: Q3.3 2399.43,3213.43 R23.2
NetQ3_2: Q3.1 R26.2 | length 169.6
  Top Layer w10: Q3.1@2325.54,3213.43 R26.2
NetR27_1: R27.1 U5.27
NetR28_1: R28.1 U5.28
NetR31_2: R31.2 U5.39
NetR32_2: R32.2 U5.40
NetR33_2: R33.2 U5.1
NetR34_2: R34.2 U5.2
NetR35_2: R35.2 U5.3
NetR36_2: R36.2 U5.4
NetR39_2: R39.2 U6.9
NetR40_1: R40.1 U6.11
NRET: LCD1.17 U4.6 | length 3440.5
  Top Layer w10: v1@3942,3174 3958.21,3190.21 U4.6
  Bottom Layer w10: v1@3940.5,3174.5 3940,3174 3940,2041.94 4662.94,1319 5741,1319 LCD1.17@5816,1244 ; 3962,3190 3963,3190
  other v1: 3941,3175
NRST: C22.1 D2.1 JTAG.11 K17.1 R19.1 U4.58 | length 1331.6
  Top Layer w10: K17.1@2858,3684.64 2963.83,3790.46 C22.1 3013,3795.46 R19.1 ; D2.1 2939.54,3940.46 2966.46,3913.54 R19.1 ; 3039.54,3887 R19.1 ; JTAG.11@3720,3779 3771,3728 3771,3647 3926,3492 4118,3492 4224.42,3385.58 U4.58@4224.42,3356.5
NRSTPD: NFC_SPI.6 U4.43 | length 1059.7
  Top Layer w10: U4.43 4600.21,3190.21 4823,3413 4823,3822 NFC_SPI.6@4970,3969
NRSTPD1: SPI.6 U5.9
NSS: NFC_SPI.8 U4.41 | length 1195
  Top Layer w10: U4.41 4621.84,3150.84 4873,3402 4873,3671 NFC_SPI.8@5171,3969
NSS1: SPI.8 U5.29
PSB: LCD1.15 U4.5 | length 3312
  Top Layer w10: v1@3916,3211 U4.5@4034.39,3211
  Bottom Layer w10: v1@3915.5,3203.5 3914,3202 3914,2035 4654,1295 5562,1295 LCD1.15@5611.5,1245.5
  other v1: 3915,3205
R0: K1.2 K2.2 K3.2 K4.2 R9.2 | length 2092.8
  Top Layer w10: K4.2@2988,2572 R9.2
  Bottom Layer w10: K1.2@1181.64,2573.07 K4.2@2984.93,2573.07
R1: K5.2 K6.2 K7.2 K8.2 R10.2 | length 2266.2
  Top Layer w10: K8.2@2984,2171 3060,2247 3060,2313 3234,2487 R10.2
  Bottom Layer w10: K5.2@1180.93,2173.07 K8.2@2984,2173.07
R2: K9.2 K10.2 K11.2 K12.2 R11.2 | length 2574.1
  Top Layer w10: K12.2@2990,1768 3116,1894 3116,2274 3244,2402 R11.2
  Bottom Layer w10: K9.2@1181.64,1773.07 2982.93,1773.07 K12.2@2983,1773
R3: K13.2 K14.2 K15.2 K16.2 R13.2 | length 2902.5
  Top Layer w10: K16.2@2984,1368 3179,1563 3179,2254 3231,2306 R13.2@3278,2306
  Bottom Layer w10: K13.2@1183,1373 1183.07,1373.07 K16.2@2984,1373.07 ; K14.2@1691.64,1373.07 K14.2@1696.64,1368.07 ; K15.2@2176.64,1368.07 K15.2@2181.64,1373.07
R/W: LCD1.5 U4.3 | length 2494.7
  Top Layer w10: v1@3857,3250 U4.3@4036,3250 ; U4.3@4034.76,3250 U4.3
  Bottom Layer w10: v1@3857,3252 3856,3251 3856,2024 4605,1275 LCD1.5@4605,1248
  other v1: 3857,3251
RI: RS232.2 U6.2
RS: LCD1.4 U4.2 | length 2533.4
  Top Layer w10: v1@3825,3266 3858,3299 3892,3299 3922.05,3268.95 U4.2
  Bottom Layer w10: v1@3827,3269 3827,2018 4500,1345 LCD1.4@4500,1251
  other v1: 3827,3266
RTS: RS232.8 U6.24
RXD: RS232.7 U6.25
RXD1: GSM.3 U1.36 | length 1403.5
  Top Layer w10: GSM.3@6428,3980 6428,3824 6638,3614 6638,3015 6441.25,2818.25 U1.36
SCK1: SPI.2 U5.36
SCL: U2.6 U4.36 | length 656.6
  Top Layer w10: U4.36 4640.42,3052.42 U2.6@4986,3398
SDA: U2.5 U4.37 | length 597.1
  Top Layer w10: U4.37 4615.1,3072.1 U2.5@4936.5,3393.5
SET1: NFC_SPI.5 U4.44 | length 995.5
  Top Layer w10: U4.44 4587.9,3209.9 4795,3417 4795,3901 NFC_SPI.5@4868,3974
SIGIN: SMARTMX.2 U5.10
SIGOUT: SMARTMX.3 U5.11
SIM_CLK: R8.1 U1.25 | length 131.9
  Top Layer w10: R8.1@5779,2857 5789,2857 5813,2833 U1.25@5813,2745
SIM_IO: R4.2 U1.27 | length 129.1
  Top Layer w10: R4.2 5893.2,2852.8 5926,2820 U1.27@5926,2748
SIM_RST: R7.1 U1.26 | length 296.4
  Top Layer w10: R7.1@5781,3002 5787,3002 5844,2945 5844,2834 5870,2808 U1.26@5870,2746
SIMO1: NFC_SPI.4 U4.45 | length 926.8
  Top Layer w10: U4.45 4577.58,3229.58 4769,3421 NFC_SPI.4@4769,3972
SOMI1: NFC_SPI.3 U4.46 | length 916.1
  Top Layer w10: U4.46 4568.27,3249.27 4738,3419 4738,3906 NFC_SPI.3@4672,3972
TCK: JTAG.7 U4.57 | length 595
  Top Layer w10: JTAG.7@3921,3779 3969,3731 3969,3630 4030,3569 4096,3569 4244.1,3420.9 U4.57@4244.1,3356.5
TDI: JTAG.3 U4.55 | length 491
  Top Layer w10: JTAG.3@4118,3779 4170,3727 4170,3643 4283.47,3529.53 U4.55@4283.47,3356.5
TDO: JTAG.1 U4.54 | length 459.5
  Top Layer w10: JTAG.1@4220,3778 4227,3778 4303,3702 U4.54@4303,3361 ; JTAG.1@4221,3776 JTAG.1@4225,3776
TMS: JTAG.5 U4.56 | length 522.5
  Top Layer w10: JTAG.5@4020,3778 4069,3729 4069,3657 4263.79,3462.21 U4.56@4263.79,3356.5
TXD: RS232.6 U6.26
TXD2: GSM.4 U1.35 | length 1414.4
  Top Layer w10: GSM.4 6330,3813 6596,3547 6596,3024 6386,2814 6386,2757 U1.35@6383,2754
UCLK1: NFC_SPI.2 U4.47 | length 910.6
  Top Layer w10: U4.47 4557.95,3268.95 4715,3426 4715,3824 NFC_SPI.2@4570,3969
URXD0: GSM_UART.3 U4.33 | length 1877.5
  Top Layer w10: U4.33 4995.36,2993.36 5453,3451 5453,3515 GSM_UART.3@5908,3970
URXD1: U4.35 USB_UART.3 | length 1646.4
  Top Layer w10: U4.35 4965.73,3032.73 5270,3337 5270,3753 USB_UART.3@5487,3970
UTXD0: GSM_UART.2 U4.32 | length 2039.1
  Top Layer w10: U4.32 4402.45,2922.5 4447.96,2968 5002,2968 GSM_UART.2@6006,3972
UTXD1: U4.34 USB_UART.2 | length 1724.3
  Top Layer w10: U4.34 4982.05,3013.05 5301,3332 5301,3687 USB_UART.2@5590,3976
VBAT: GSM.2 U1.53 U1.54 | length 2325.1
  Top Layer w20: GSM.2 6530,3803 6714,3619 6714,1896 U1.54@6629.5,1811.5 ; U1.53@6622,1869 6623,1868 U1.54@6623,1814
VCC-3.3V: C27.2 C38.2 D2.2 JTAG.2 LED2.1 NFC_SPI.1 R19.2 R27.2 R28.2 R31.1 SMARTMX.1 SPI.1 U3.2 U3.4 U4.1 U4.64 U5.5 U5.6 U5.12 U5.15 U5.18 USB_UART.1 | length 3303.3
  Top Layer w10: U3.2 U3.2@2231,3770 ; R19.2@3012.73,3980.73 R19.2 ; U4.1 4035.5,3343.5 4051.5,3359.5 U4.64
  Top Layer w20: LED2.1@2281,4032 2281,3843 2204,3766 2226,3766 2267,3725 U3.4@2443,3725 ; LED2.1 2463,4030 2624,3869 2759,3869 2788,3898 2788,4079 2843,4134 2953,4134 D2.2@3008,4079 ; D2.2 3006.46,3985.54 R19.2@3012,3980 ; R19.2 4463.54,3980.46 NFC_SPI.1@4472,3972
VCC-5V: BEEP1.1 C10.2 C11.2 C20.1 C21.2 D1.2 F1.2 GSM.1 GSM_UART.1 LCD1.2 LED3.1 LED4.1 R12.1 R14.2 U1.22 U2.8 U3.3 | length 2366.2
  Top Layer w20: BEEP1.1@1487,3423 1693.46,3629.46 F1.2 ; F1.2@1694,3671 D1.2@1760,3671 ; D1.2@1760,3666 1809,3617 2027,3617 2059,3649 C20.1@2059,3864 ; C21.2@2062,3693 2190,3693 2204,3679 2582,3679 2814,3447 LED4.1@2814,3354 ; LED3.1@2818,3177 2813,3182 2813,3354 R12.1@3071,3354 ; R12.1@3054,3354 3064,3344 R12.1@3064,3366
VCCUSB: C42.1 C43.2 P6.1 RS232.1 U6.7 U6.8
VSIM: R6.1 U1.28 | length 124.8
  Top Layer w10: U1.28@5985,2745 5985,2809 6005,2829 R6.1
pads on no net: JTAG.4 JTAG.6 JTAG.8 JTAG.10 JTAG.12 JTAG.13 JTAG.14 LCD1.16 LCD1.18 P6. P6.5 P6.MH1 P6.MH2 S1.2 S1.5 U1.1 U1.2 U1.3 U1.4 U1.5 U1.6 U1.7 U1.10 U1.11 U1.12 U1.13 U1.14 U1.15 U1.16 U1.17 U1.18 U1.19 U1.20 U1.21 U1.23 U1.24 U1.29 U1.30 U1.31 U1.32 U1.33 U1.34 U1.37 U1.38 U1.39 U1.40 U1.41 U1.42 U1.43 U1.44 U1.45 U1.46 U1.47 U1.48 U1.49 U1.50 U1.51 U1.52 U1.57 U1.58 U1.59 U1.61 U1.62 U1.63 U1.64 U1.65 U1.66 U1.67 U2.7 U4.7 U4.10 U4.11 U4.28 U4.29 U4.30 U4.31 U4.48 U4.49 U4.50 U4.51 U4.59 U4.60 U4.61 U5.13 U5.22 U5.23 U5.31 U5.32 U5.33 U5.34 U5.35 U5.41 U6.10 U6.12 U6.13 U6.14 U6.15 U6.16 U6.17 U6.18 U6.19 U6.20 U6.21 U6.22 U6.29
copper on no net:
  other v1: 3737,2968 3704,2989
  other v2: 8147.76,2240.76 8195,2240.76 8242.24,2240.76 8147.76,2288 8195,2288 8242.24,2288 8147.76,2335.24 8195,2335.24 8242.24,2335.24 7408.13,4580.13 7455.38,4580.13 7502.62,4580.13 7549.87,4580.13 7408.13,4627.38 7455.38,4627.38 7502.62,4627.38 7549.87,4627.38 7408.13,4674.62 7455.38,4674.62 7502.62,4674.62 7549.87,4674.62 7408.13,4721.87 7455.38,4721.87 7502.62,4721.87 7549.87,4721.87
  other v3: 3345,1255 6755,1255 1163,2738 3345,3770 6755,3770

## Keep-outs
Keep-Out Layer:
  lines w20: 1003,1098 6916,1098 6916,4187 ; 1005,1100 1005,4187 1006,4188 ; 1005,4188 6916,4188

## Text inside footprints (layer, text, board x,y; h text height)
BEEP1: Top Overlay "+" at 1457,3535 h60 r270
J1: Bottom Overlay "SIM" at 6843,3472 h118.11
JTAG: Top Overlay "2" at 4273,3665 h50; Top Overlay "1" at 4288,3763 h50; Top Overlay "13" at 3498,3785 h50; Top Overlay "14" at 3495,3671 h50
LCD1: Top Overlay "LCD" at 3506,3492 h60
P6: Mechanical 1 "PCB Edge" at 9042.03,2189.1 h9.84 r90